# EAGLE board Board (EAGLE 9.7.0)
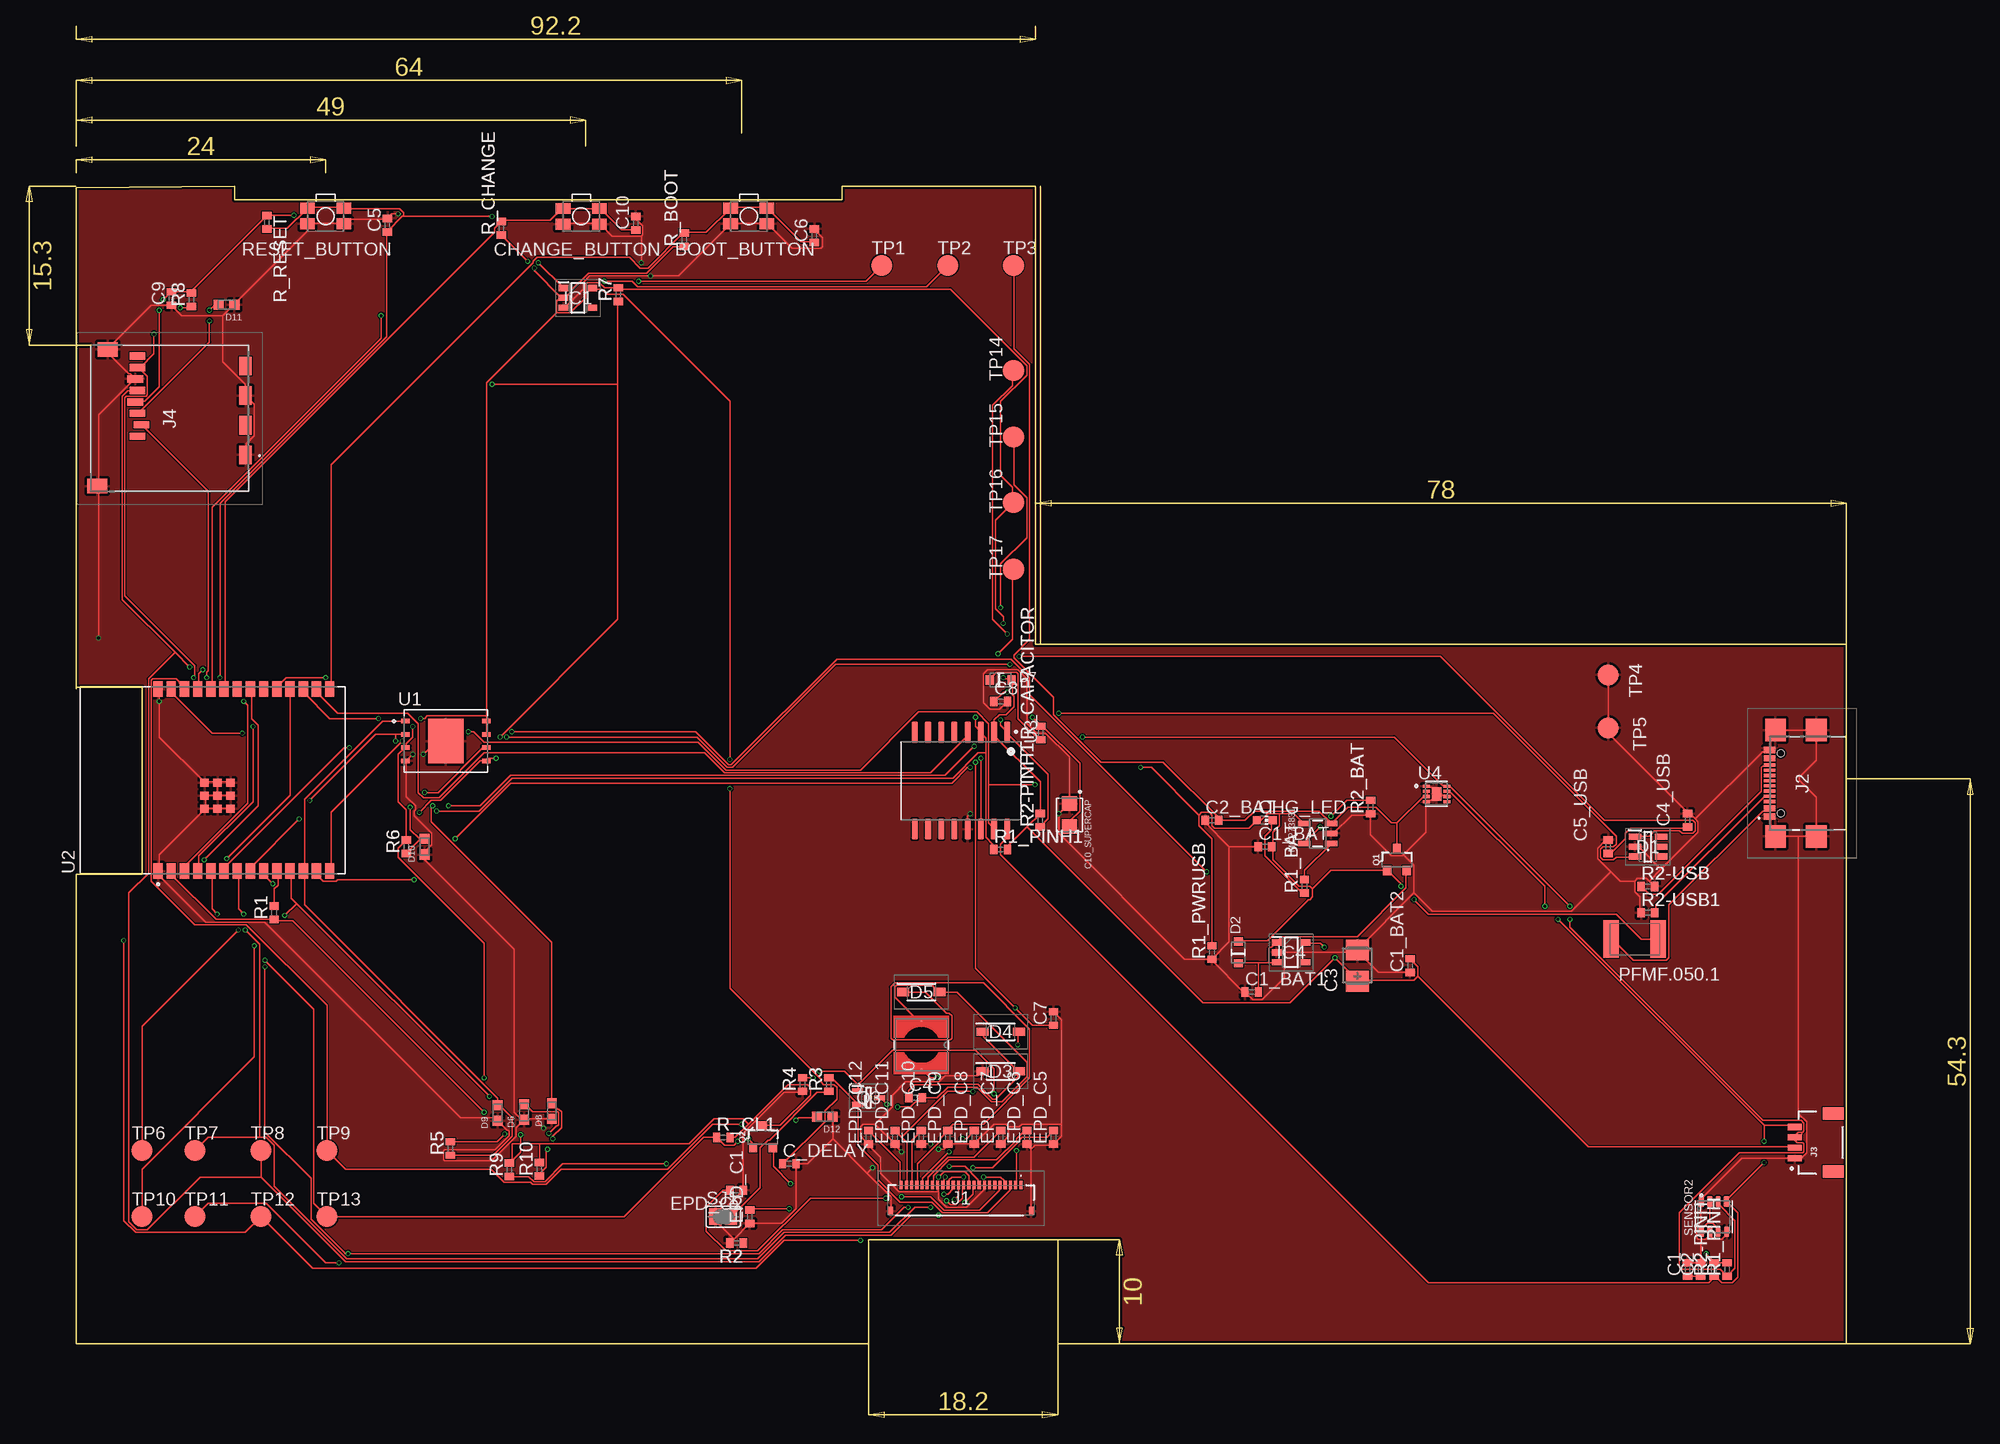
[diagram p0: board, top side]
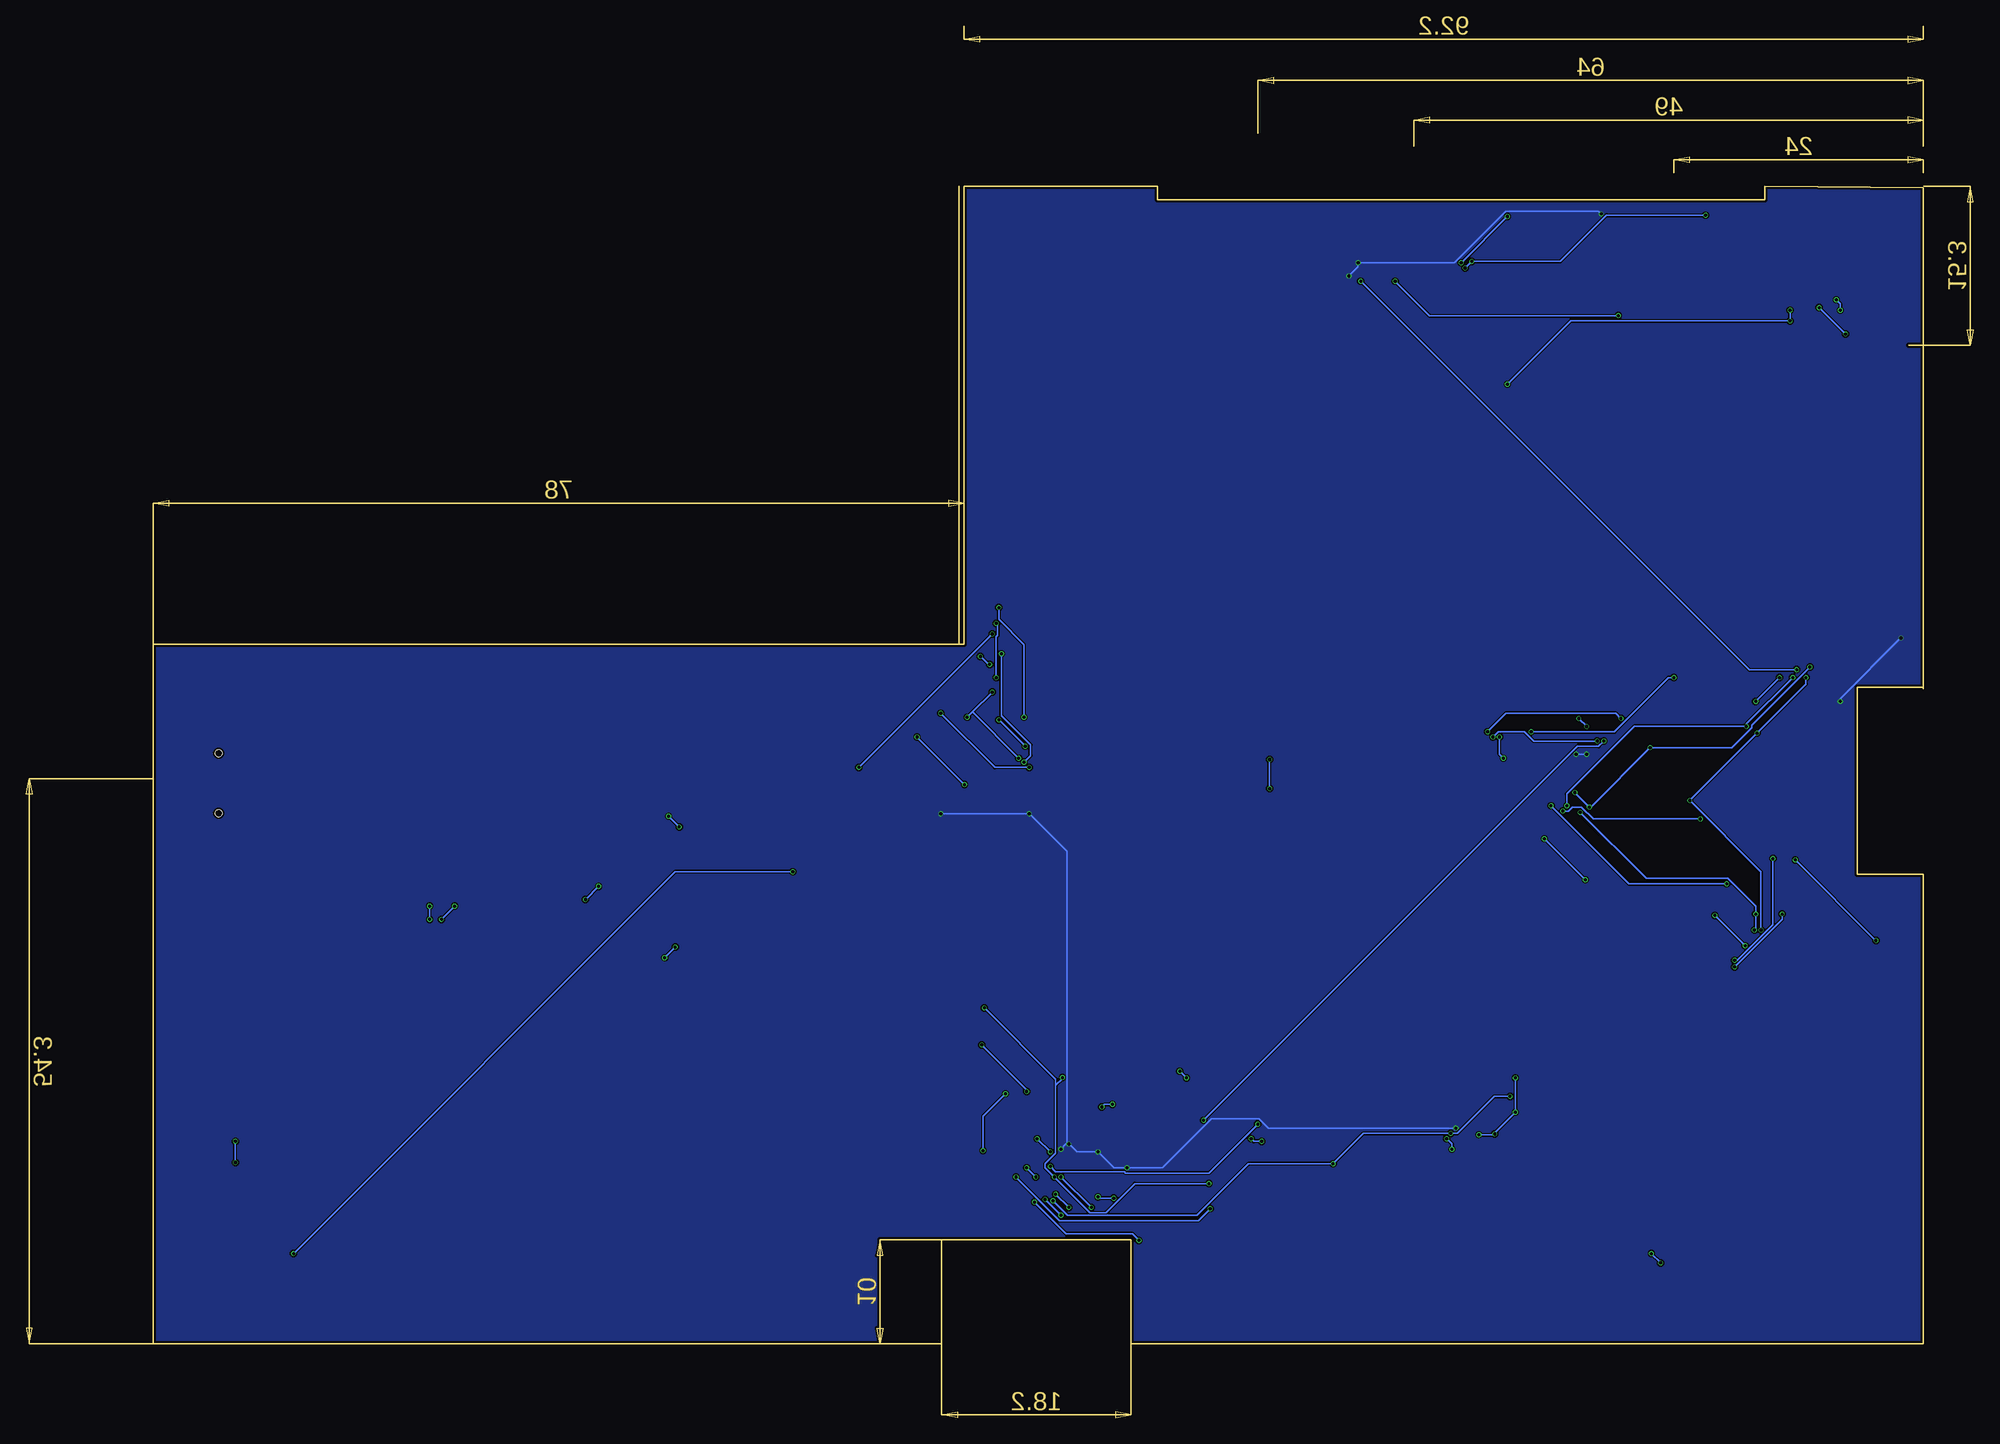
[diagram p1: board, bottom side, seen from below]

Size 170.23 x 111.28 mm. Coordinates in mm from the lower left corner, seen from the top.
Outline: 0,111.13 15.24,111.28 15.24,109.94 73.66,109.94 73.66,111.28 92.23,111.28 92.23,67.24 170.23,67.24 170.23,0 94.4,0 94.4,10 76.2,10 76.2,0 0,0 0,45.12 6.34,45.12 6.34,63.12 0,63.12 0,62.97 0,111.13
Copper layers (1*16): Top 0.035mm / dielectric 1.6mm / Bottom 0.035mm
Design rules "jlcpcb-2layers": minimum track width 5mil, minimum drill 0.3mm, track to track 5mil, track to pad 5mil, pad to pad 5mil, via to via 5mil, smd to smd 5mil, copper to edge 0.2mm, drill to drill 6mil, minimum pad ring 10mil, minimum via ring 3mil, stop-mask expansion 4mil, vias tented up to drill 0mil, thermal gap 10mil

## Footprints (pad centres in the part's own frame; a part is rotated, then mirrored left to right if it is on the bottom)
MYBUTTON = smd 1.4 x 1.05: 1 1.75,0.75; 2 -1.75,0.75; 3 -1.75,-0.75; 4 1.75,-0.75
EAGLE-LTSPICE_C0402 = smd 0.7 x 0.9: 1 -0.65,0; 2 0.65,0
RCL_CT3528 = smd 2 x 2.2: + -1.5,0; - 1.5,0
CAPCP3225X100N = smd 1.4 x 1.4: 1 -1.1,0; 2 1.1,0
ADAFRUIT_CHIP-LED0603 = smd 0.8 x 0.8: A 0,-0.75; C 0,0.75
SOT95P280X145-6N = smd 1.2 x 0.6: 1 -1.25,0.95; 2 -1.25,0; 3 -1.25,-0.95; 4 1.25,-0.95; 5 1.25,0; 6 1.25,0.95
ESP32_WROVER_AVX---SD0805S020S1R0_AVX_SD0805S020S1R0_0 = smd 0.8 x 0.9: 1 -1.05,0; 2 1.05,0
SOD3716X135N = smd 1.15 x 0.8: 1 -1.75,0; 2 1.75,0
DIOC1608X36N = smd 0.97 x 0.94: 1 -0.75,0; 2 0.75,0
SOT95P280X125-5N = smd 0.9 x 0.6: 1 -1.4,0.95; 2 -1.4,0; 3 -1.4,-0.95; 4 1.4,-0.95; 5 1.4,0.95
SOT95P280X120-5N = smd 0.9 x 0.6: 1 -1.4,0.95; 2 -1.4,0; 3 -1.4,-0.95; 4 1.4,-0.95; 5 1.4,0.95
FH34SRJ24S05SH99 = smd 0.3 x 0.8: 1 5.75,1.45; 2 5.25,1.45; 3 4.75,1.45; 4 4.25,1.45; 5 3.75,1.45; 6 3.25,1.45; 7 2.75,1.45; 8 2.25,1.45; 9 1.75,1.45; 10 1.25,1.45; 11 0.75,1.45; 12 0.25,1.45; 13 -0.25,1.45; 14 -0.75,1.45; 15 -1.25,1.45; 16 -1.75,1.45; 17 -2.25,1.45; 18 -2.75,1.45; 19 -3.25,1.45; 20 -3.75,1.45; 21 -4.25,1.45; 22 -4.75,1.45; 23 -5.25,1.45; 24 -5.75,1.45 | smd 0.4 x 0.8: MP1 6.75,-1.05; MP2 -6.75,-1.05
SAMACSYS_PARTS_USB4110GFA = smd 0.3 x 1.15: A1 -3.35,3.678; A4 -2.55,3.678; A5 -1.25,3.678; A6 -0.25,3.678; A7 0.25,3.678; A8 1.25,3.678; A9 2.55,3.678; A12 3.35,3.678; B1 3.05,3.678; B4 2.25,3.678; B5 1.75,3.678; B6 0.75,3.678; B7 -0.75,3.678; B8 -1.75,3.678; B9 -2.25,3.678; B12 -3.05,3.678 | smd 2.18 x 2: MP1 -5.11,-0.827; MP2 5.11,-0.827; MP3 -5.11,3.103; MP4 5.11,3.103 | hole 0.65: -2.89,2.603; 2.89,2.603
JST04_1MM_RA = smd 0.6 x 1.35: 1 -1.5,0; 2 -0.5,0; 3 0.5,0; 4 1.5,0 | smd 1.2 x 2: NC1 2.8,-3.675; NC2 -2.8,-3.675
112ATAARR03ATTEND = smd 1.8 x 1.2: G1 10.6,10.4; G2 4.9,10.4; S1 7.75,10.4; S2 2.05,10.4 | smd 1.4 x 1.9: G3 13.6,-3.85; G4 0.45,-2.85 | smd 0.7 x 1.5: P1 8.8,0; P2 7.7,0.4; P3 6.6,0; P4 5.5,-0.2; P5 4.4,0; P6 3.3,-0.2; P7 2.2,0; P8 1.1,0
IND_4828-WE-TPC_WRE = smd 0.127 x 0.127: 1 -2.286,0; 2 2.286,0
ESP32_WROVER_SPARKFUN-IC-POWER_SOT23-5 = smd 0.55 x 1.2: 1 -0.95,-1.3; 2 0,-1.3; 3 0.95,-1.3; 4 0.95,1.3; 5 -0.95,1.3
ESP32C6_VARISTOR_CT/CN1812 = smd 1.5 x 3.6: 1 -2.25,0; 2 2.25,0
ESP32_WROVER_SPARKFUN-DISCRETESEMI_SOT23-3 = smd 0.8 x 0.9: 1 -0.95,-1; 2 0.95,-1; 3 0,1.1
SOT65P210X110-3N = smd 1.05 x 0.5: 1 -1.05,0.65; 2 -1.05,-0.65; 3 1.05,0
ESP32_WROVER_EAGLE-LTSPICE_R0402 = smd 0.7 x 0.9: 1 -0.65,0; 2 0.65,0
ESP32_WROVER_BME680_PSON80P300X300X100-8N = smd 1.016 x 0.5: 1 1.458,1.2; 2 1.458,0.4; 3 1.458,-0.4; 4 1.458,-1.2; 5 -1.458,-1.22; 6 -1.458,-0.4; 7 -1.458,0.4; 8 -1.458,1.2
SJ = smd 1.168 x 1.6: 1 -0.762,0; 2 0.762,0
TP20R = smd 2 x 2: TP 0,0
SON127P600X800X80-9N = smd 0.94 x 0.44: 1 -3.895,1.905; 2 -3.895,0.635; 3 -3.895,-0.635; 4 -3.895,-1.905; 5 3.895,-1.905; 6 3.895,-0.635; 7 3.895,0.635; 8 3.895,1.905 | smd 3.4 x 4.3: 9 0,0
XCVR_ESP32-C6-WROOM-1-N8 = smd 1.5 x 0.9: 1 -8.75,5.26; 2 -8.75,3.99; 3 -8.75,2.72; 4 -8.75,1.45; 5 -8.75,0.18; 6 -8.75,-1.09; 7 -8.75,-2.36; 8 -8.75,-3.63; 9 -8.75,-4.9; 10 -8.75,-6.17; 11 -8.75,-7.44; 12 -8.75,-8.71; 13 -8.75,-9.98; 14 -8.75,-11.25; 15 8.75,-11.25; 16 8.75,-9.98; 17 8.75,-8.71; 18 8.75,-7.44; 19 8.75,-6.17; 20 8.75,-4.9; 21 8.75,-3.63; 22 8.75,-2.36; 23 8.75,-1.09; 24 8.75,0.18; 25 8.75,1.45; 26 8.75,2.72; 27 8.75,3.99; 28 8.75,5.26 | smd 0.8 x 0.8: 29_1 -2.755,0.79; 29_2 -1.505,0.79; 29_3 -0.255,0.79; 29_4 -2.755,-0.46; 29_5 -1.505,-0.46; 29_6 -0.255,-0.46; 29_7 -2.755,-1.71; 29_8 -1.505,-1.71; 29_9 -0.255,-1.71
SOIC127P1032X265-16N = smd 2.05 x 0.59: 1 -4.655,4.445; 2 -4.655,3.175; 3 -4.655,1.905; 4 -4.655,0.635; 5 -4.655,-0.635; 6 -4.655,-1.905; 7 -4.655,-3.175; 8 -4.655,-4.445; 9 4.655,-4.445; 10 4.655,-3.175; 11 4.655,-1.905; 12 4.655,-0.635; 13 4.655,0.635; 14 4.655,1.905; 15 4.655,3.175; 16 4.655,4.445
SON50P200X200X80-9N = smd 0.76 x 0.27: 1 -0.985,0.75; 2 -0.985,0.25; 3 -0.985,-0.25; 4 -0.985,-0.75; 5 0.985,-0.75; 6 0.985,-0.25; 7 0.985,0.25; 8 0.985,0.75 | smd 0.9 x 1.3: 9 0,0

## Placement (x,y rotation side)
BOOT_BUTTON  [MYBUTTON]  64.69,108.39 180 top
C1  100nF  [EAGLE-LTSPICE_C0402]  154.94,7.14 90 top
C1_BAT  4.7uF  [EAGLE-LTSPICE_C0402]  114.3,47.78 0 top
C1_BAT1  4.7uF  [EAGLE-LTSPICE_C0402]  113.03,33.81 0 top
C1_BAT2  4.7uF  [EAGLE-LTSPICE_C0402]  128.27,36.35 90 top
C2  100nF  [EAGLE-LTSPICE_C0402]  156.21,7.14 90 top
C2_BAT  4.7uF  [EAGLE-LTSPICE_C0402]  109.22,50.32 0 top
C3  100uF TANT  [RCL_CT3528]  123.19,36.35 90 top
C4  4.7uF/25V  [EAGLE-LTSPICE_C0402]  80.71,23.65 0 top
C4_USB  100nF  [EAGLE-LTSPICE_C0402]  154.94,50.32 90 top
C5  1uF  [EAGLE-LTSPICE_C0402]  29.95,107.52 90 top
C5_USB  4.7uF  [EAGLE-LTSPICE_C0402]  147.32,47.78 90 top
C6  100nF  [EAGLE-LTSPICE_C0402]  70.99,106.52 90 top
C7  10uF  [EAGLE-LTSPICE_C0402]  93.98,31.27 90 top
C8  100nF  [EAGLE-LTSPICE_C0402]  88.9,61.75 0 top
C9  100uF  [EAGLE-LTSPICE_C0402]  9.19,100.47 90 top
C10  100nF  [EAGLE-LTSPICE_C0402]  53.81,107.72 90 top
C10_SUPERCAP  CPH3225A  [CAPCP3225X100N]  95.52,50.82 270 top
C_DELAY  100nF  [EAGLE-LTSPICE_C0402]  68.58,17.3 0 top
CHANGE_BUTTON  [MYBUTTON]  48.58,108.38 180 top
CHG_LED  [ADAFRUIT_CHIP-LED0603]  114.3,50.32 270 top
D1  USBLC6-2SC6Y  [SOT95P280X145-6N]  151.13,47.78 0 top
D2  ESP32_WROVER_AVX---SD0805S020S1R0_AVX_SD0805S020S1R0_0_0AVX_SD0805S020S1R0_0_0  [ESP32_WROVER_AVX---SD0805S020S1R0_AVX_SD0805S020S1R0_0]  111.76,37.62 90 top
D3  MBR0530  [SOD3716X135N]  88.9,26.19 0 top
D4  MBR0530  [SOD3716X135N]  88.9,30 0 top
D5  MBR0530  [SOD3716X135N]  81.28,33.81 0 top
D6  PGB1010603MR  [DIOC1608X36N]  43.08,22.28 90 top
D7  ESP32_WROVER_AVX---SD0805S020S1R0_AVX_SD0805S020S1R0_0_0AVX_SD0805S020S1R0_0_0  [ESP32_WROVER_AVX---SD0805S020S1R0_AVX_SD0805S020S1R0_0]  88.9,63.79 0 top
D8  PGB1010603MR  [DIOC1608X36N]  45.75,22.38 90 top
D9  PGB1010603MR  [DIOC1608X36N]  40.54,22.18 90 top
D10  PGB1010603MR  [DIOC1608X36N]  33.52,47.78 90 top
D11  PGB1010603MR  [DIOC1608X36N]  14.48,99.87 180 top
D12  PGB1010603MR  [DIOC1608X36N]  71.98,21.83 180 top
EPD_C1  0.1uF/50V  [EAGLE-LTSPICE_C0402]  64.77,12.22 90 top
EPD_C2  0.1uF/50V  [EAGLE-LTSPICE_C0402]  63.5,14.76 180 top
EPD_C5  0.1uF/50V  [EAGLE-LTSPICE_C0402]  93.98,19.84 90 top
EPD_C6  0.1uF/50V  [EAGLE-LTSPICE_C0402]  91.44,19.84 90 top
EPD_C7  0.1uF/50V  [EAGLE-LTSPICE_C0402]  88.9,19.84 90 top
EPD_C8  0.1uF/50V  [EAGLE-LTSPICE_C0402]  86.36,19.84 90 top
EPD_C9  0.1uF/50V  [EAGLE-LTSPICE_C0402]  83.82,19.84 90 top
EPD_C10  0.1uF/50V  [EAGLE-LTSPICE_C0402]  81.28,19.84 90 top
EPD_C11  0.1uF/50V  [EAGLE-LTSPICE_C0402]  78.74,19.84 90 top
EPD_C12  0.1uF/50V  [EAGLE-LTSPICE_C0402]  76.2,19.84 90 top
IC1  BD5229G-TR  [SOT95P280X125-5N]  48.27,100.54 0 top
IC4  XC6220A331MR-G  [SOT95P280X120-5N]  116.84,37.62 0 top
J1  FH34SRJ-24S-0.5SH_99_  [FH34SRJ24S05SH99]  85.09,13.8 0 top
J2  J2  [SAMACSYS_PARTS_USB4110GFA]  166.51,53.88 90 top
J3  QWIIC_RIGHT_ANGLE  [JST04_1MM_RA]  165.28,19.34 90 top
J4  112A-TAAR-R03_ATTEND  [112ATAARR03ATTEND]  5.89,96.04 270 top
L1  68uH  [IND_4828-WE-TPC_WRE]  81.28,28.73 270 top
MCP73831  [ESP32_WROVER_SPARKFUN-IC-POWER_SOT23-5]  119.38,49.05 90 top
PFMF.050.1  [ESP32C6_VARISTOR_CT/CN1812]  149.86,38.89 0 top
Q1  20V/4.2A/52mΩ/1.4W  [ESP32_WROVER_SPARKFUN-DISCRETESEMI_SOT23-3]  127,46.51 0 top
Q2  20V/4.2A/52mΩ/1.4W  [ESP32_WROVER_SPARKFUN-DISCRETESEMI_SOT23-3]  66.04,19.84 0 top
Q3  SI1308EDL-T1-GE3  [SOT65P210X110-3N]  76.2,23.65 0 top
R1  10K  [ESP32_WROVER_EAGLE-LTSPICE_R0402]  19.05,41.43 90 top
R1_BAT  200  [ESP32_WROVER_EAGLE-LTSPICE_R0402]  118.11,43.97 90 top
R1_PINH  10K  [ESP32_WROVER_EAGLE-LTSPICE_R0402]  158.75,7.14 90 top
R1_PINH1  10K  [ESP32_WROVER_EAGLE-LTSPICE_R0402]  88.9,47.51 0 top
R1_PWRUSB  100K  [ESP32_WROVER_EAGLE-LTSPICE_R0402]  109.22,37.62 90 top
R2  2.2  [ESP32_WROVER_EAGLE-LTSPICE_R0402]  63.5,9.68 180 top
R2-PINH  10K  [ESP32_WROVER_EAGLE-LTSPICE_R0402]  157.48,7.14 90 top
R2-PINH1  10K  [ESP32_WROVER_EAGLE-LTSPICE_R0402]  92.71,50.32 90 top
R2-USB  5k1  [ESP32_WROVER_EAGLE-LTSPICE_R0402]  151.13,43.97 0 top
R2-USB1  5k1  [ESP32_WROVER_EAGLE-LTSPICE_R0402]  151.13,41.43 0 top
R2_BAT  2K  [ESP32_WROVER_EAGLE-LTSPICE_R0402]  124.46,51.59 90 top
R3  0.47  [ESP32_WROVER_EAGLE-LTSPICE_R0402]  72.39,24.92 90 top
R4  10K  [ESP32_WROVER_EAGLE-LTSPICE_R0402]  69.85,24.92 90 top
R5  10K  [ESP32_WROVER_EAGLE-LTSPICE_R0402]  35.99,18.77 90 top
R6  10K  [ESP32_WROVER_EAGLE-LTSPICE_R0402]  31.75,47.78 90 top
R7  10K  [ESP32_WROVER_EAGLE-LTSPICE_R0402]  52.14,100.85 90 top
R8  10K  [ESP32_WROVER_EAGLE-LTSPICE_R0402]  11.1,100.35 90 top
R9  10K  [ESP32_WROVER_EAGLE-LTSPICE_R0402]  41.68,16.72 90 top
R10  10K  [ESP32_WROVER_EAGLE-LTSPICE_R0402]  44.55,16.77 90 top
R_BOOT  10K  [ESP32_WROVER_EAGLE-LTSPICE_R0402]  58.48,106.12 90 top
R_CAPACITOR  15  [ESP32_WROVER_EAGLE-LTSPICE_R0402]  92.75,58.71 90 top
R_CHANGE  10K  [ESP32_WROVER_EAGLE-LTSPICE_R0402]  40.91,107.22 90 top
R_CL1  10K  [ESP32_WROVER_EAGLE-LTSPICE_R0402]  62.23,19.84 0 top
R_RESET  10K  [ESP32_WROVER_EAGLE-LTSPICE_R0402]  18.35,107.82 270 top
RESET_BUTTON  [MYBUTTON]  24,108.39 180 top
SENSOR2  BME688  [ESP32_WROVER_BME680_PSON80P300X300X100-8N]  157.48,12.22 90 top
SJ1  [SJ]  62.23,12.22 0 top
TP1  TPTP20R  [TP20R]  77.47,103.66 0 top
TP2  TPTP20R  [TP20R]  83.82,103.66 0 top
TP3  TPTP20R  [TP20R]  90.14,103.66 0 top
TP4  TPTP20R  [TP20R]  147.32,64.29 270 top
TP5  TPTP20R  [TP20R]  147.32,59.21 270 top
TP6  TPTP20R  [TP20R]  6.35,18.57 0 top
TP7  TPTP20R  [TP20R]  11.43,18.57 0 top
TP8  TPTP20R  [TP20R]  17.78,18.57 0 top
TP9  TPTP20R  [TP20R]  24.13,18.57 0 top
TP10  TPTP20R  [TP20R]  6.35,12.22 0 top
TP11  TPTP20R  [TP20R]  11.43,12.22 0 top
TP12  TPTP20R  [TP20R]  17.78,12.22 0 top
TP13  TPTP20R  [TP20R]  24.13,12.22 0 top
TP14  TPTP20R  [TP20R]  90.14,93.55 90 top
TP15  TPTP20R  [TP20R]  90.14,87.15 90 top
TP16  TPTP20R  [TP20R]  90.14,80.85 90 top
TP17  TPTP20R  [TP20R]  90.14,74.45 90 top
U1  W25Q512JVEIQ  [SON127P600X800X80-9N]  35.56,57.94 0 top
U2  ESP32-C6-WROOM-1-N8  [XCVR_ESP32-C6-WROOM-1-N8]  13.14,54.18 90 top
U3  DS3231SN#  [SOIC127P1032X265-16N]  85.09,54.13 270 top
U4  MAX17048G+T10  [SON50P200X200X80-9N]  130.81,52.86 0 top

## Library data of the parts
BOOT_BUTTON CHANGE_BUTTON CHG_LED PFMF.050.1 RESET_BUTTON SJ1 TP1-TP17 = DeskAssistant v19 v1
C1 C1_BAT C1_BAT1 C1_BAT2 C2 C2_BAT C4 C4_USB C5 C5_USB C6-C10 C_DELAY EPD_C1 EPD_C2 EPD_C5-EPD_C12 = DeskAssistant v19 v1; SPICEMODEL: NONE; SPICEPREFIX: C
C3 = DeskAssistant v19 v1; SPICEPREFIX: C
C10_SUPERCAP = DeskAssistant v19 v1; AVAILABILITY: Not in stock; CHECK_PRICES: https://www.snapeda.com/parts/CPH3225A/Seiko+Instruments/view-part/?ref=eda; DESCRIPTION: 11 mF (EDLC) Supercapacitor 3.3 V 1210 (3225 Metric) - -; MF: Seiko Instruments; MP: CPH3225A; PACKAGE: 1210 Seiko; PRICE: None; PURCHASE-URL: https://www.snapeda.com/api/url_track_click_mouser/?unipart_id=562593&manufacturer=Seiko Instruments&part_name=CPH3225A&search_term=None; SNAPEDA_LINK: https://www.snapeda.com/parts/CPH3225A/Seiko+Instruments/view-part/?ref=snap
D1 = DeskAssistant v19 v1; AVAILABILITY: In Stock; CHECK_PRICES: https://www.snapeda.com/parts/USBLC6-2SC6Y/STMicroelectronics/view-part/?ref=eda; DESCRIPTION: 17V Clamp 5A (8/20µs) Ipp Tvs Diode Surface Mount SOT-23-6; MF: STMicroelectronics; MP: USBLC6-2SC6Y; PACKAGE: SOT-23-6 STMicroelectronics; PRICE: None; SNAPEDA_LINK: https://www.snapeda.com/parts/USBLC6-2SC6Y/STMicroelectronics/view-part/?ref=snap
D2 D7 = DeskAssistant v19 v1; CENTROID_NOT_SPECIFIED: No; DATASHEET: http://datasheets.avx.com/schottky.pdf; DIGIKEY_DESCRIPTION: DIODE SCHOTTKY 20V 1A 0805; DIGIKEY_PART_NUMBER: 478-7800-1-ND; LEAD_FREE: yes; MF: AVX; MOUSER_PART_NUMBER: 581-SD0805S020S1R0; PACKAGE: 0805 (2012 metric); PREFIX: D; ROHS: yes; TEMPERATURE_RANGE_HIGH: +125°C; TEMPERATURE_RANGE_LOW: -55°C
D3-D5 = DeskAssistant v19 v1; AVAILABILITY: In Stock; CHECK_PRICES: https://www.snapeda.com/parts/MBR0530/Onsemi/view-part/?ref=eda; DESCRIPTION: Diode Schottky 30 V 500mA Surface Mount SOD-123; MF: ON Semiconductor; MP: MBR0530; PACKAGE: SOD-123-2 ON Semiconductor; PRICE: None; PURCHASE-URL: https://www.snapeda.com/api/url_track_click_mouser/?unipart_id=179458&manufacturer=ON Semiconductor&part_name=MBR0530&search_term=None; SNAPEDA_LINK: https://www.snapeda.com/parts/MBR0530/Onsemi/view-part/?ref=snap
D6 D8-D12 = DeskAssistant v19 v1; AVAILABILITY: In Stock; CHECK_PRICES: https://www.snapeda.com/parts/PGB1010603MR/Littelfuse/view-part/?ref=eda; DESCRIPTION: 150V (Typ) Clamp - Ipp Tvs Diode Surface Mount 0603 (1608 Metric); MF: Littelfuse Inc.; MP: PGB1010603MR; PACKAGE: 0603 Littelfuse Inc.; PRICE: None; PURCHASE-URL: https://www.snapeda.com/api/url_track_click_mouser/?unipart_id=5659453&manufacturer=Littelfuse Inc.&part_name=PGB1010603MR&search_term=None; SNAPEDA_LINK: https://www.snapeda.com/parts/PGB1010603MR/Littelfuse/view-part/?ref=snap
IC1 = DeskAssistant v19 v1; DESCRIPTION: Voltage Detector with Adjustable Delay Time: CMOS processes are utilized to develop high precision, low current consumption CMOS reset ICs that allow arbitrary setting of the delay time. The extensive lineup includes both Nch Open Drain and CMOS output types in a wide range of detection voltages (from 2.3V to 6.0V, in 0.1V steps), enabling selection of the ideal solution based on customer requirements. In addition, the entire series is of course both lead-free and RoHS-compliant.; HEIGHT: 1.25mm; MANUFACTURER_NAME: ROHM Semiconductor; MANUFACTURER_PART_NUMBER: BD5229G-TR; MOUSER_PART_NUMBER: 755-BD5229G-TR; MOUSER_PRICE-STOCK: https://www.mouser.co.uk/ProductDetail/ROHM-Semiconductor/BD5229G-TR?qs=4kLU8WoGk0vvnhrrYwdszw%3D%3D
IC4 = DeskAssistant v19 v1; DESCRIPTION: LDO Voltage Regulators; HEIGHT: 1.2mm; MANUFACTURER_NAME: Torex; MANUFACTURER_PART_NUMBER: XC6220A331MR-G; MOUSER_PART_NUMBER: 865-XC6220A331MR-G; MOUSER_PRICE-STOCK: https://www.mouser.co.uk/ProductDetail/Torex-Semiconductor/XC6220A331MR-G?qs=AsjdqWjXhJ8ZSWznL1J0gg%3D%3D
J1 = DeskAssistant v19 v1; DESCRIPTION: 24 Position FFC, FPC Connector Contacts, Top and Bottom 0.020" (0.50mm) Surface Mount, Right Angle; HEIGHT: 1.1mm; MANUFACTURER_NAME: Hirose; MANUFACTURER_PART_NUMBER: FH34SRJ-24S-0.5SH(99); MOUSER_PART_NUMBER: 798-FH34SRJ24S05SH99; MOUSER_PRICE-STOCK: https://www.mouser.co.uk/ProductDetail/Hirose-Connector/FH34SRJ-24S-0.5SH99?qs=vcbW%252B4%252BSTIpKBl5ap9J8Fw%3D%3D
J2 = DeskAssistant v19 v1; DESCRIPTION: CONN USB 2.0 TYPE-C R/A SMT; HEIGHT: 3.26mm; MANUFACTURER_NAME: GCT (GLOBAL CONNECTOR TECHNOLOGY); MANUFACTURER_PART_NUMBER: USB4110-GF-A; MOUSER_PART_NUMBER: 640-USB4110-GF-A; MOUSER_PRICE-STOCK: https://www.mouser.co.uk/ProductDetail/GCT/USB4110-GF-A?qs=KUoIvG%2F9IlYiZvIXQjyJeA%3D%3D
J3 = DeskAssistant v19 v1; PROD_ID: CONN-13694
J4 = DeskAssistant v19 v1; DESCRIPTION: Micro SD Card Socket, Push-Push Type, Top Mount, SMT, H=1.83mm, 10u; HEIGHT: 1.9mm; MANUFACTURER_NAME: ATTEND; MANUFACTURER_PART_NUMBER: 112A-TAAR-R03 ATTEND
L1 = DeskAssistant v19 v1; COPYRIGHT: Copyright (C) 2024 Ultra Librarian. All rights reserved.; MANUFACTURER_PART_NUMBER: 744043680; MFR_NAME: Wurth Electronics
MCP73831 = DeskAssistant v19 v1; PROD_ID: IC-09995
Q1 Q2 = DeskAssistant v19 v1; PROD_ID: TRAN-14388
Q3 = DeskAssistant v19 v1; AVAILABILITY: In Stock; CHECK_PRICES: https://www.snapeda.com/parts/SI1308EDL-T1-GE3/Vishay+Siliconix/view-part/?ref=eda; DESCRIPTION: Si1308EDL-T1-GE3 N-channel MOSFET Transistor, 1.5 A, 30 V, 3-Pin SC-70 | Siliconix / Vishay SI1308EDL-T1-GE3; MF: Vishay Siliconix; MP: SI1308EDL-T1-GE3; PACKAGE: SOT-323 Vishay Semiconductor; PRICE: None; PURCHASE-URL: https://www.snapeda.com/api/url_track_click_mouser/?unipart_id=274603&manufacturer=Vishay Siliconix&part_name=SI1308EDL-T1-GE3&search_term=None; SNAPEDA_LINK: https://www.snapeda.com/parts/SI1308EDL-T1-GE3/Vishay+Siliconix/view-part/?ref=snap
R1 R1_BAT R1_PINH R1_PINH1 R1_PWRUSB R2 R2-PINH R2-PINH1 R2-USB R2-USB1 R2_BAT R3-R10 R_BOOT R_CAPACITOR R_CHANGE R_CL1 R_RESET = DeskAssistant v19 v1; SPICEMODEL: NONE; SPICEPREFIX: R
SENSOR2 = DeskAssistant v19 v1; AVAILABILITY: Unavailable; DESCRIPTION: Integrated Environmental Unit; MF: Bosch Sensortec; MP: BME680; PACKAGE: LGA-8 Bosch Tools; PRICE: None
U1 = DeskAssistant v19 v1; AVAILABILITY: In Stock; CHECK_PRICES: https://www.snapeda.com/parts/W25Q512JVEIQ/Winbond+Electronics/view-part/?ref=eda; DESCRIPTION: FLASH - NOR Memory IC 512Mb (64M x 8) SPI - Quad I/O 133 MHz 8-WSON (8x6); MF: Winbond Electronics; MP: W25Q512JVEIQ; PACKAGE: Package; PRICE: None; SNAPEDA_LINK: https://www.snapeda.com/parts/W25Q512JVEIQ/Winbond+Electronics/view-part/?ref=snap
U2 = DeskAssistant v19 v1; AVAILABILITY: In Stock; CHECK_PRICES: https://www.snapeda.com/parts/ESP32-C6-WROOM-1-N8/Espressif+Systems/view-part/?ref=eda; DESCRIPTION: Multiprotocol Modules ESP32-C6 module, Wi-Fi 6 in 2.4 GHz band, Bluetooth 5, Zigbee 3.0 and Thread. ESP34-WROOM Compatible - ENGINEERING SAMPLE; MF: Espressif Systems; MP: ESP32-C6-WROOM-1-N8; PACKAGE: None; PRICE: None; SNAPEDA_LINK: https://www.snapeda.com/parts/ESP32-C6-WROOM-1-N8/Espressif+Systems/view-part/?ref=snap
U3 = DeskAssistant v19 v1; AVAILABILITY: In Stock; CHECK_PRICES: https://www.snapeda.com/parts/DS3231SN%23/Analog+Devices/view-part/?ref=eda; DESCRIPTION: Extremely Accurate I²C-Integrated RTC/TCXO/Crystal; MF: Analog Devices; MP: DS3231SN#; PACKAGE: SOIC-16 Maxim; PRICE: None; PURCHASE-URL: https://www.snapeda.com/api/url_track_click_mouser/?unipart_id=99048&manufacturer=Analog Devices&part_name=DS3231SN#&search_term=None; SNAPEDA_LINK: https://www.snapeda.com/parts/DS3231SN%23/Analog+Devices/view-part/?ref=snap
U4 = DeskAssistant v19 v1; AVAILABILITY: In Stock; CHECK_PRICES: https://www.snapeda.com/parts/MAX17048G+T10/Analog+Devices/view-part/?ref=eda; DESCRIPTION: 3µA 1-Cell/2-Cell Fuel Gauge with ModelGauge; MF: Analog Devices; MP: MAX17048G+T10; PACKAGE: TDFN-8 Maxim; PRICE: None; PURCHASE-URL: https://www.snapeda.com/api/url_track_click_mouser/?unipart_id=329239&manufacturer=Analog Devices&part_name=MAX17048G+T10&search_term=None; SNAPEDA_LINK: https://www.snapeda.com/parts/MAX17048G+T10/Analog+Devices/view-part/?ref=snap

## Nets
2C_PW: SENSOR2.2 SENSOR2.6 SENSOR2.8
3V3: C1_BAT2.2 C3.+ C9.2 D7.2 IC1.2 IC4.5 J3.2 J4.P4 Q2.3 R1.1 R1_PINH1.2 R2-PINH1.2 R5.2 R6.2 R7.2 R8.2 R9.2 R10.2 R_BOOT.1 R_CHANGE.1 R_CL1.2 R_RESET.1 TP16.TP U1.3 U1.7 U1.8 U2.2 U3.2
32KHZ: R2-PINH1.1 U2.9 U3.1
DN: J2.A7
DP: J2.A6
EPD_3V3: C7.1 J1.16 L1.2 Q2.2 TP17.TP
EPD_3V3_C: Q2.1 R_CL1.1 TP13.TP U2.18
EPD_BUSY: J1.9 TP9.TP U2.26
EPD_CS: D6.2 J1.12 R9.1 TP10.TP U2.11
EPD_DC: J1.11 TP11.TP U2.5
EPD_RST: J1.10 TP12.TP U2.21
FLASH_CS: D9.2 R5.1 U1.1 U2.12
GDR: J1.2 Q3.1 R4.2
GND: BOOT_BUTTON.1 BOOT_BUTTON.2 C1.2 C1_BAT1.1 C1_BAT2.1 C1_BAT.1 C2.2 C2_BAT.1 C3.- C4_USB.2 C5.2 C5_USB.2 C6.2 C7.2 C8.2 C9.1 C10.2 C10_SUPERCAP.1 C_DELAY.2 CHANGE_BUTTON.1 CHANGE_BUTTON.2 D1.2 D3.1 D6.1 D8.1 D9.1 D10.1 D11.1 D12.1 EPD_C1.1 EPD_C2.1 EPD_C5.1 EPD_C6.1 EPD_C7.1 EPD_C8.1 EPD_C9.1 EPD_C10.1 EPD_C11.1 EPD_C12.1 IC1.3 IC4.2 J1.8 J1.17 J1.MP1 J1.MP2 J2.A1 J2.A12 J2.B1 J2.B12 J2.MP1 J2.MP2 J2.MP3 J2.MP4 J3.1 J4.G1 J4.G2 J4.G3 J4.G4 J4.P6 MCP73831.2 R1_PWRUSB.1 R2-USB1.1 R2-USB.2 R2.2 R2_BAT.1 R4.1 RESET_BUTTON.1 RESET_BUTTON.2 SENSOR2.1 SENSOR2.5 SENSOR2.7 SJ1.1 TP4.TP TP5.TP U1.4 U1.9 U2.1 U2.28 U2.29_1 U2.29_2 U2.29_3 U2.29_4 U2.29_5 U2.29_6 U2.29_7 U2.29_8 U2.29_9 U3.13 U4.1 U4.4 U4.6 U4.9
GPIO8: R1.2 U2.10
I2C_PW: R1_PINH.2 R2-PINH.2 U2.17
INT_RTC: R1_PINH1.1 TP15.TP U2.8 U3.3
IO/BOOT: BOOT_BUTTON.3 BOOT_BUTTON.4 C6.1 R_BOOT.2 U2.15
IO/CHANGE: C10.1 CHANGE_BUTTON.3 CHANGE_BUTTON.4 R_CHANGE.2 U2.23
MISO: D12.2 J4.P7 R8.1 TP6.TP U1.2 U2.27
MOSI: D11.2 J1.14 J4.P3 R7.1 TP7.TP U1.5 U2.7
N$1: J2.A5 R2-USB1.2
N$2: J2.B5 R2-USB.1
N$3: J2.B9
N$4: J2.A9
N$5: J2.B4
N$6: J2.B6
N$7: D1.4
N$8: D1.5
N$9: D1.6
N$10: C4_USB.1 C5_USB.1
N$11: J2.B7
N$12: R2.1
N$13: C4.1 D3.2 D4.1
N$14: MCP73831.1 R1_BAT.2
N$15: C1_BAT1.2 D2.1 IC4.1 IC4.3 Q1.2
N$16: CHG_LED.C R1_BAT.1
N$17: EPD_C12.2 J1.24
N$18: MCP73831.5 R2_BAT.2
N$19: C1.1 C2.1
N$20: C_DELAY.1 IC1.5
N$21: D7.1 R_CAPACITOR.1
N$22: EPD_C10.2 J1.22
N$26: EPD_C8.2 J1.20
N$28: EPD_C7.2 J1.19
N$30: EPD_C6.2 J1.18
N$32: EPD_C5.2 J1.15
N$34: EPD_C2.2 J1.5
N$36: EPD_C1.2 J1.4
PREVGH: D5.1 EPD_C9.2 J1.21
PREVGL: D4.2 EPD_C11.2 J1.23
RESE: J1.3 Q3.2 R3.2
RESE': R3.1 SJ1.2
RESET: C5.1 IC1.1 R_RESET.2 RESET_BUTTON.3 RESET_BUTTON.4 U2.3
RTC_RST: U2.16 U3.4
RX: TP2.TP U2.24
SCK: D10.2 J1.13 J4.P5 R6.1 TP8.TP U1.6 U2.6
SCL: J3.4 R2-PINH.1 SENSOR2.4 U3.16 U4.7
SDA: J3.3 R1_PINH.1 SENSOR2.3 U2.19 U3.15 U4.8
SLC: U2.20
SRC: C4.2 D5.2 L1.1 Q3.3
SS_SD: D8.2 J4.P2 R10.1 U2.4
TX: TP1.TP U2.25
USB_D+: D1.1 U2.14
USB_D-: D1.3 U2.13
VBAT: C2_BAT.2 MCP73831.3 Q1.3 TP3.TP U4.2 U4.3
VBUS: C1_BAT.2 CHG_LED.A D2.2 MCP73831.4 PFMF.050.1.2 Q1.1 R1_PWRUSB.2 TP14.TP
VRTC: C8.1 C10_SUPERCAP.2 R_CAPACITOR.2 U3.14
VUSB: J2.A4 PFMF.050.1.1

## Tracks (layer width: path | path; a pad name or v marks a point on that pad's centre or on a via)
2C_PW
  Top 0.127: 157.1,11.58 157.35,11.58 157.86,11.08 157.86,10.82 SENSOR2.6 | 157.1,11.58 156.84,11.58 156.34,11.08 156.34,10.82 SENSOR2.8 | 157.1,11.58 157.1,13.62 SENSOR2.2
3V3  (via drill 0.3)
  Top 0.127: 91.44,49.68 92.71,50.95 R2-PINH1.2 92.71,54 88.27,58.45 U3.2 88.27,59.97 88.77,60.48 89.41,60.48 90.17,61.24 90.17,62.26 90.04,62.38 90.04,63.78 D7.2 89.92,63.91 89.28,63.91 v89.15,64.03 | 91.44,49.68 89.66,47.91 89.66,47.52 R1_PINH1.2 | v120.02,38.13 119.63,38.51 118.36,38.51 IC4.5 | 123.19,34.95 v121.03,37.11 116.71,32.79 108.33,32.79 91.44,49.68 | 129.03,35.33 129.03,36.22 128.27,36.98 C1_BAT2.2 | 129.03,35.33 128.65,34.95 123.19,34.95 | 123.19,34.95 C3.+ | 129.03,35.33 145.41,18.95 165.17,18.95 J3.2 | U2.2 9.27,45.37 9.27,44.98 13.46,40.79 19.05,40.79 R1.1 19.05,40.67 20.83,40.67 v39.24,22.25 | v42.74,20.09 42.74,18.43 R9.2 41.93,17.62 41.93,19.2 44.55,19.2 | R_CL1.2 63.37,19.84 64.64,21.11 | 64.64,21.11 68.45,24.92 70.36,24.92 70.61,24.66 70.61,23.9 67.69,20.98 66.04,20.98 Q2.3 | 44.55,19.2 58.93,19.2 61.34,21.62 64.14,21.62 64.64,21.11 | 44.55,19.2 R10.2 | 11.05,101.12 C9.2 9.14,101.12 v8.38,100.36 | 11.05,101.12 18.29,108.36 R_RESET.1 18.41,108.48 v20.95,108.48 | 11.05,101.12 R8.2 | v8,99.34 8,91.97 6.6,90.58 5.71,90.58 J4.P4 | 39.5,59.84 39.5,58.57 U1.7 | v43.43,104.04 41.02,106.45 R_CHANGE.1 | v44.07,103.4 44.07,103.15 46.61,100.61 | 46.61,100.61 46.86,100.61 IC1.2 | 46.23,99.09 47.5,99.09 49.02,100.61 49.02,101.88 49.15,102.01 50.29,102.01 50.8,101.5 52.07,101.5 R7.2 52.2,101.37 84.07,101.37 91.44,94.01 91.44,93.12 88.9,90.58 88.9,83.47 90.04,82.32 90.04,80.92 TP16.TP 90.04,80.8 88.39,79.15 88.39,70.64 89.15,69.88 v89.15,69.24 | 46.23,99.09 46.23,100.23 46.61,100.61 | 46.61,100.61 IC1.2 | R_BOOT.1 58.42,105.44 57.4,105.44 54.86,102.9 49.28,102.9 47.62,101.25 47.62,101.12 46.99,100.48 IC1.2
  Top 0.127: 39.5,60.35 39.5,92.36 46.23,99.09 | 39.5,60.35 39.5,59.84 | 39.5,59.84 U1.8 | v32.39,59.34 32.39,58.32 31.75,57.68 31.75,57.3 U1.3 31.62,57.3 30.99,56.67 30.99,52.1 31.75,51.33 R6.2 31.75,48.41 30.99,47.65 30.99,46.76 39.24,38.51 v39.24,25.55 | v33.15,60.1 33.53,60.1 33.78,60.35 39.5,60.35 | v41.22,20.16 40.48,19.42 R5.2
  Bottom 0.127: v121.03,37.11 v120.02,38.13 | 41.39,20.11 v39.24,22.25 v39.24,25.55 | v8,99.34 8,99.97 v8.38,100.36 | v44.07,103.4 v43.43,104.04 34.92,104.04 30.48,108.48 v20.95,108.48 | v33.15,60.1 v32.39,59.34 | v89.15,64.03 89.15,67.97 89.03,68.1 89.03,69.11 v89.15,69.24 | v42.74,20.09 41.4,20.09 41.39,20.11 | 41.39,20.11 41.27,20.11 v41.22,20.16
32KHZ  (via drill 0.3)
  Top 0.127: R2-PINH1.1 92.71,49.68 93.47,50.45 93.47,54.76 89.53,58.7 U3.1 89.53,58.83 88.9,59.46 v88.9,59.97 | v18.92,44.22 18.16,44.98 18.16,45.37 U2.9 | v35.81,51.72 38.86,51.72 41.78,54.64 83.57,54.64 v86.36,57.43
  Bottom 0.127: v18.92,44.22 28.32,44.22 v35.81,51.72 | v88.9,59.97 v86.36,57.43
EPD_3V3  (via drill 0.3)
  Top 0.127: v83.57,16.03 83.44,15.9 83.44,15.27 J1.16 | L1.2 82.14,25.58 v82.79,25.58 | v68.71,15.39 67.06,17.04 67.06,18.82 Q2.2 | C7.1 93.98,30.63 91.95,30.63 v90.3,32.28 86.49,36.09 v86.49,55.91 | v88.65,66.32 90.04,67.72 90.04,74.45 TP17.TP
  Bottom 0.127: 83.44,24.83 83.44,25.43 v90.3,32.28 | 83.44,24.83 83.44,18.31 84.45,17.3 84.45,16.92 v83.57,16.03 80.14,12.6 78.61,12.6 75.82,15.39 v68.71,15.39 | v88.65,66.32 88.65,60.35 85.85,57.56 85.85,56.54 v86.49,55.91 | v82.79,25.58 82.79,25.48 83.44,24.83
EPD_3V3_C  (via drill 0.3)
  Top 0.127: v64.64,19.71 65.02,19.33 65.02,18.95 Q2.1 | v63.63,19.46 63.25,19.08 62.36,19.08 61.59,19.84 R_CL1.1 60.33,19.84 52.7,12.22 TP13.TP 22.86,13.49 22.86,32.16 v18.16,36.86 | v14.48,46.64 20.57,52.73 20.57,62.89 U2.18
  Bottom 0.127: v64.64,19.71 64.39,19.46 v63.63,19.46 | v14.48,46.64 14.48,40.28 17.91,36.86 v18.16,36.86
EPD_BUSY  (via drill 0.3)
  Top 0.127: v83.95,17.04 85.47,17.04 86.74,15.77 86.74,15.27 J1.9 | v64.01,21.11 61.21,21.11 56.9,16.79 46.65,16.79 45.18,15.32 43.92,15.32 43.71,15.53 41.15,15.53 39.89,16.79 25.91,16.79 TP9.TP 24.13,32.54 16.38,40.28 11.43,40.28 7.24,44.48 7.24,63.78 7.37,63.91 9.65,63.91 9.91,63.65 9.91,63.53 10.41,63.02 U2.26
  Bottom 0.127: v83.95,17.04 83.44,16.54 76.84,16.54 76.71,16.41 68.71,16.41 v64.01,21.11
EPD_CS  (via drill 0.3)
  Top 0.127: v83.69,13.74 84.07,13.36 84.58,13.36 85.22,14 85.22,15.14 J1.12 | D6.2 43.17,23.03 43.89,22.3 46.3,22.3 46.41,22.19 46.41,21.06 46.3,20.95 46.2,20.95 v45.47,20.22 | 21.21,42.32 v39.75,23.78 | 21.21,42.32 20.7,42.83 20.7,45.37 U2.11 | TP10.TP 6.35,16.79 17.14,27.59 v17.14,38.25 | 21.21,42.32 v20.07,41.17 | v56.77,17.3 46.8,17.3 45.08,15.58 44.02,15.58 43.53,16.07 R9.1
  Bottom 0.127: v83.69,13.74 82.3,12.35 69.85,12.35 64.9,17.3 v56.77,17.3 53.85,20.22 v45.47,20.22 44.83,20.22 41.28,23.78 v39.75,23.78 | v20.07,41.17 v17.14,38.25
EPD_DC  (via drill 0.3)
  Top 0.127: v82.93,16.03 83.44,16.54 85.47,16.54 85.85,16.16 85.85,15.27 J1.11 | v80.01,13.11 79.63,13.11 77.47,10.95 67.95,10.95 65.66,8.66 v26.16,8.66 25.91,8.66 22.61,11.96 22.61,15.9 18.16,20.35 v18.16,36.22 | v25.27,7.77 24,7.77 18.29,13.49 12.7,13.49 TP11.TP | v13.59,41.3 13.08,41.81 13.08,45.37 U2.5
  Bottom 0.127: v80.01,13.11 v82.93,16.03 | v25.27,7.77 v26.16,8.66 | v13.59,41.3 13.59,40.79 v18.16,36.22
EPD_RST  (via drill 0.3)
  Top 0.127: v85.47,13.62 86.23,14.38 86.23,15.14 J1.10 | v75.44,9.93 68.07,9.93 65.41,7.27 22.73,7.27 TP12.TP 16.26,10.69 5.71,10.69 4.57,11.84 v4.57,38.76 | v12.32,46.51 17.53,51.72 17.53,59.46 16.89,60.1 16.89,62.89 U2.21
  Bottom 0.127: v85.47,13.62 82.42,10.57 76.07,10.57 v75.44,9.93 | v4.57,38.76 v12.32,46.51
FLASH_CS
  Top 0.127: U1.1 29.46,59.84 21.97,52.35 21.97,45.49 U2.12 21.97,45.37 21.97,42.19 40.54,23.62 D9.2 40.72,22.93 41.94,21.71 41.94,19.93 40.13,18.12 R5.1
GDR  (via drill 0.3)
  Top 0.127: v90.42,18.57 90.42,15.27 J1.2 | v88.27,24.03 88.27,26.44 86.49,28.22 78.49,28.22 75.18,24.92 | 75.18,24.92 75.18,24.41 Q3.1 | v70.87,25.55 69.85,25.55 R4.2 | v71.5,26.19 73.91,26.19 75.18,24.92
  Bottom 0.127: v90.42,18.57 90.42,21.87 v88.27,24.03 | v71.5,26.19 v70.87,25.55
GND  (via drill 0.3)
  Top 0.127: 54.36,106.45 54.48,106.58 54.48,107.47 53.85,108.1 53.85,108.36 C10.2 | 54.36,106.45 51.56,106.45 50.42,107.59 CHANGE_BUTTON.2 50.29,107.72 46.86,107.72 CHANGE_BUTTON.1 | C6.2 70.99,107.09 71.76,106.33 71.76,105.44 71.63,105.31 68.83,105.31 66.55,107.59 BOOT_BUTTON.2 66.42,107.72 62.99,107.72 BOOT_BUTTON.1 62.87,107.59 57.91,102.64 v55.25,102.64 49.4,102.64 48.77,102.01 48.77,101.37 46.99,99.59 IC1.3 | v54.36,103.91 54.36,106.45 | J4.G1 16.38,85.5 16.38,86.51 17.14,87.27 17.14,90.32 16.38,91.08 J4.G2 16.26,91.21 16.26,92.23 14.1,94.39 14.1,98.83 | 14.1,98.83 10.16,98.83 9.27,99.72 C9.1 9.14,99.85 7.24,99.85 3.05,95.66 J4.G4 3.05,95.53 3.05,95.28 5.08,93.24 5.21,93.24 5.59,92.86 J4.P6 5.59,92.74 2.16,89.31 2.16,82.45 J4.G3 2.16,82.32 v2.16,67.84 | 14.1,98.83 15.11,99.85 D11.1 15.24,99.97 22.22,106.96 22.22,107.59 RESET_BUTTON.1 22.35,107.72 25.65,107.72 RESET_BUTTON.2 25.78,107.72 26.16,108.1 29.85,108.1 C5.2 29.97,108.23 30.35,108.61 v30.99,108.61 | U2.29_8 14.73,52.73 13.72,52.73 U2.29_5 13.59,52.73 | 12.45,51.46 12.45,52.6 U2.29_2 12.45,52.73 13.59,52.73 | U2.29_7 14.73,51.46 13.72,51.46 U2.29_4 13.59,51.46 12.45,51.46 | 12.45,51.46 U2.29_1 12.32,51.33 8,47.02 8,45.49 U2.1 8,45.37 8,44.98 12.45,40.54 18.16,40.54 36.96,21.74 40.54,21.74 D9.1 41.46,20.51 41.58,20.51 41.64,20.45 41.64,19.99 40.31,18.66 35.46,18.66 35.35,18.55 35.35,17.69 35.46,17.58 39.94,17.58 42.33,19.96 42.33,20.76 43.08,21.52 | U2.29_6 13.59,54 12.45,54 U2.29_3 12.32,54 8,58.32 v8,61.75 8,62.89 U2.28 | U2.29_9 14.73,54 13.72,54 U2.29_6 | 13.59,52.73 13.59,53.87 U2.29_6
  Top 0.127: 43.08,21.52 43.18,21.62 44.45,21.62 | 44.45,21.62 45.75,21.62 D8.1 | 43.08,21.52 D6.1 42.86,21.53 42.12,22.26 42.12,37.92 33.52,46.52 D10.1 33.52,47.3 34.18,47.96 34.18,49.09 32.51,50.76 32.51,51.21 32.64,51.33 32.64,51.72 31.75,52.6 31.75,56.03 | U1.9 34.67,57.94 v33.4,56.67 | 31.75,56.03 v32.39,56.67 | 31.75,56.03 U1.4 | C1.2 154.94,7.77 156.21,7.77 C2.2 156.21,10.06 | 157.1,10.44 157.1,10.69 SENSOR2.7 157.1,10.44 | 157.1,10.44 157.48,10.06 158.24,10.06 158.62,10.44 158.62,10.69 SENSOR2.5 | 156.21,10.06 156.72,10.06 157.1,10.44 | 156.21,10.06 155.96,10.06 155.83,10.19 155.83,11.33 156.21,11.71 156.21,13.62 SENSOR2.1 156.34,13.74 156.34,14 160.18,17.84 165.86,17.84 | J2.B12 162.81,50.83 162.81,50.57 J2.A1 162.94,50.45 162.94,49.17 163.32,48.79 J2.MP3 163.45,48.79 165.61,48.79 | 165.61,48.79 167.26,48.79 J2.MP1 167.34,52.52 165.7,54.16 165.7,54.44 167.34,56.08 J2.MP2 167.26,58.95 163.45,58.95 J2.MP4 163.32,58.95 162.94,58.57 162.94,57.3 J2.A12 162.81,57.18 162.81,57.05 J2.B1 162.81,56.92 162.18,56.92 155.7,50.45 | TP4.TP TP5.TP 147.32,58.7 154.94,51.08 C4_USB.2 154.94,50.95 155.19,50.95 155.7,50.45 | 149.86,44.48 149.86,43.46 150.37,42.95 150.37,41.43 R2-USB1.1 | 149.86,44.48 150.11,44.73 151,44.73 151.26,44.48 | 151.26,44.48 151.77,43.97 R2-USB.2 | 147.57,45.37 148.46,44.48 149.86,44.48 | 147.57,45.37 146.3,46.64 146.3,47.65 147.07,48.41 147.32,48.41 C5_USB.2 | 155.7,50.45 155.96,50.19 155.96,49.17 152.4,45.62 | 151.26,44.48 152.4,45.62 | D1.2 150.24,47.78 152.4,45.62 | 72.77,19.71 76.07,16.41 | 76.07,16.41 78.36,14.12 78.36,12.85 J1.MP2 | 72.77,19.71 72.77,21.74 D12.1
  Top 0.127: 72.77,19.71 70.36,17.3 C_DELAY.2 69.22,17.3 69.22,12.98 67.82,11.58 64.77,11.58 | 64.77,11.58 63.25,10.06 | 63.25,10.06 62.87,9.68 R2.2 | 64.14,14.76 62.61,13.23 62.23,13.23 61.47,12.47 SJ1.1 61.47,11.84 63.25,10.06 | 64.14,14.76 64.14,20.22 68.07,24.16 69.85,24.16 R4.1 | 64.14,14.76 EPD_C2.1 | 64.77,11.58 EPD_C1.1 | 82.93,14.63 82.93,13.87 83.69,13.11 85.6,13.11 87.25,14.76 87.25,15.14 J1.8 | 82.93,14.63 82.93,15.14 J1.17 | 76.84,21.11 75.69,21.11 75.44,20.85 75.44,19.96 76.2,19.2 EPD_C12.1 76.2,19.08 77.34,17.93 77.34,16.41 79.12,14.63 82.93,14.63 | 76.84,21.11 78.74,19.2 EPD_C11.1 78.74,19.08 v79.38,18.44 | 76.84,21.11 78.49,22.76 78.49,23.9 79.75,25.17 82.96,25.17 83.53,25.74 86.7,25.74 D3.1 | v82.17,19.2 81.28,19.2 EPD_C10.1 | v82.93,18.7 83.44,18.7 83.82,19.08 EPD_C9.1 83.82,19.2 86.36,19.2 | 89.66,20.85 89.66,19.96 88.9,19.2 EPD_C7.1 | 89.66,20.85 89.41,21.11 88.27,21.11 86.36,19.2 | 86.36,19.2 EPD_C8.1 | 91.82,18.7 91.82,12.85 J1.MP1 | 91.82,18.7 91.44,19.08 EPD_C6.1 | 91.82,18.7 92.2,19.08 93.98,19.08 EPD_C5.1 93.98,19.2 94.74,19.96 94.74,21.11 | 94.74,21.11 94.74,31.14 93.98,31.9 C7.2 | 89.66,20.85 90.68,20.85 90.93,21.11 94.74,21.11 | v76.58,16.92 76.07,16.41 | 95.5,51.97 95.5,56.41 93.22,58.7 92.33,58.7 91.44,59.59 91.44,63.91 90.55,64.8 87.63,64.8 87.25,64.42 87.25,61.62 87.88,60.99 88.77,60.99 89.53,61.75 C8.2 | U3.13 85.73,50.7 v85.98,50.95 | 95.5,51.97 v94.49,50.95 94.49,49.05 106.55,36.98 109.22,36.98 | 95.5,51.97 C10_SUPERCAP.1 | 130.81,52.73 130.3,52.22 129.92,52.22 U4.4 129.79,52.1 129.79,49.17 127.63,47.02 | U4.1 129.92,53.49 130.3,53.49 130.81,52.98 U4.9 130.81,52.73
  Top 0.127: 130.81,52.73 131.7,52.73 U4.6 | 124.46,50.83 122.68,50.83 120.9,49.05 MCP73831.2 | 127.63,47.02 127.51,46.89 126.49,46.89 124.46,48.92 124.46,50.83 | 124.46,50.83 R2_BAT.1 | 110.87,47.78 108.59,50.06 108.59,50.32 C2_BAT.1 | C1_BAT.1 110.87,47.78 | 116.2,37.62 123.06,37.62 123.19,37.75 | 116.2,37.62 IC4.2 | 123.19,37.75 125.22,35.71 128.27,35.71 C1_BAT2.1 | 123.19,37.75 C3.- 123.19,37.87 128.65,43.33 | 116.2,37.62 116.2,35.2 114.05,33.05 113.16,33.05 112.4,33.81 C1_BAT1.1 112.27,33.81 109.22,36.86 R1_PWRUSB.1 109.22,36.98 | 110.87,47.78 110.87,38.63 109.22,36.98 | 127.63,47.02 128.65,46 128.65,43.33 | 147.57,45.37 143.76,41.55 130.43,41.55 128.65,43.33 | 44.45,21.62 44.45,21.23 v44.96,20.73 | 165.86,17.84 J3.1 165.86,17.84 | 165.61,48.79 165.61,22.11 166.4,21.32 166.4,18.35 166.14,18.09 166.12,18.09 165.86,17.84
  Bottom 0.127: v55.25,102.64 54.36,103.53 v54.36,103.91 45.08,103.91 40.13,108.86 31.24,108.86 v30.99,108.61 | v32.39,56.67 v33.4,56.67 | 82.37,19.2 82.42,19.2 v82.93,18.7 | 82.37,19.2 v82.17,19.2 81.41,18.44 v79.38,18.44 77.85,16.92 v76.58,16.92 73.15,16.92 68.45,21.62 63.88,21.62 62.99,20.73 v44.96,20.73 | v94.49,50.95 v85.98,50.95 82.37,47.35 82.37,19.2 | v2.16,67.84 8,62 v8,61.75
  pour Bottom: 76.15,10.08 76.17,10.09 94.41,10.09 94.43,10.08 94.45,10.06 94.47,10.03 94.47,0.04 170.16,0.04 170.16,67.14 92.22,67.14 92.2,67.15 92.18,67.17 92.16,67.2 92.16,111.19 73.77,111.19 73.77,109.9 73.75,109.87 73.73,109.85 73.71,109.84 15.22,109.84 15.2,109.85 15.18,109.87 15.16,109.9 15.16,111.19 0.07,111.19 0.07,0.04 76.11,0.04 76.11,10.03 76.13,10.06
  pour Top: 76.15,10.08 76.17,10.09 94.41,10.09 94.43,10.08 94.45,10.06 94.47,10.03 94.47,0.04 170.16,0.04 170.16,67.14 92.22,67.14 92.2,67.15 92.18,67.17 92.16,67.2 92.16,111.24 73.72,111.24 73.72,109.95 73.7,109.92 73.68,109.9 73.66,109.89 15.22,109.89 15.2,109.9 15.18,109.92 15.16,109.95 15.16,111.24 0.07,111.09 0.07,0.09 76.11,0.04 76.11,10.03 76.13,10.06
GPIO8
  Top 0.127: R1.2 19.05,43.71 19.43,44.09 19.43,45.37 U2.10
I2C_PW  (via drill 0.3)
  Top 0.127: R1_PINH.2 158.75,7.77 157.48,7.77 R2-PINH.2 157.48,7.9 v156.72,8.66 | v108.71,45.37 91.69,62.38 91.69,64.03 89.92,65.81 73.15,65.81 62.99,55.65 62.74,55.65 59.56,58.83 v41.91,58.83 | v29.08,60.1 24.38,60.1 21.97,62.51 21.97,62.89 U2.17
  Bottom 0.127: v156.72,8.66 120.02,45.37 v108.71,45.37 | v41.91,58.83 40.13,60.61 29.59,60.61 v29.08,60.1
INT_RTC  (via drill 0.3)
  Top 0.127: 87.5,56.8 87.5,58.19 87,58.7 U3.3 87,58.83 86.49,59.34 v86.49,60.22 | 87.5,56.8 87.5,48.67 88.14,48.03 88.14,47.52 R1_PINH1.1 | v21.46,50.45 16.89,45.87 16.89,45.49 U2.8 | v34.67,51.21 38.73,51.21 41.91,54.38 84.33,54.38 86.74,56.8 87.5,56.8 | v88.9,70.77 88.9,74.96 91.44,77.5 91.44,81.31 90.17,82.58 90.17,87.15 TP15.TP
  Bottom 0.127: v21.46,50.45 31.75,50.45 32.89,51.59 33.78,51.59 34.16,51.21 v34.67,51.21 | v88.9,70.77 88.9,69.62 86.49,67.21 v86.49,60.22
IO/BOOT
  Top 0.127: C6.1 70.87,105.94 69.72,105.94 66.55,109.12 BOOT_BUTTON.3 66.42,109.25 62.99,109.25 BOOT_BUTTON.4 62.87,109.12 60.58,106.83 58.55,106.83 R_BOOT.2 58.42,106.83 54.99,103.4 54.23,103.4 53.21,104.42 44.32,104.42 43.94,104.04 43.94,103.91 24.51,84.48 24.51,63.02 U2.15
IO/CHANGE
  Top 0.127: C10.1 53.72,107.09 52.45,107.09 50.42,109.12 CHANGE_BUTTON.3 50.29,109.12 46.86,109.12 CHANGE_BUTTON.4 46.74,109.12 45.59,107.98 41.02,107.98 R_CHANGE.2 40.89,107.85 40.26,107.21 40.26,106.83 14.35,80.92 14.35,63.02 U2.23
MISO  (via drill 0.3)
  Top 0.127: v10.03,99.59 11.05,99.59 R8.1 | v7.49,97.05 7.49,95.15 6.22,93.88 | 6.22,93.88 5.97,93.88 J4.P7 6.22,93.88 | 30.73,58.57 28.83,58.57 v22.48,52.22 | 30.73,58.57 U1.2 | v16,58.7 13.08,58.7 9.27,62.51 9.27,62.89 U2.27 | v69.22,21.49 69.47,21.74 71.12,21.74 D12.2 | 30.73,58.57 v30.73,57.94 | TP6.TP 6.35,30.51 v15.62,39.78 | 6.22,93.88 6.22,93.62 6.86,92.99 6.86,91.21 6.73,91.08 4.83,91.08 4.7,90.96 4.7,71.91 11.43,65.18 11.43,64.16 v11.3,64.03
  Bottom 0.127: v7.49,97.05 v10.03,99.59 | v69.22,21.49 33.27,57.43 31.24,57.43 v30.73,57.94 | v15.62,39.78 15.62,45.37 v22.48,52.22 v16,58.7 11.3,63.4 v11.3,64.03
MOSI  (via drill 0.3)
  Top 0.127: v12.83,99.34 13.34,99.85 13.72,99.85 D11.2 | v12.83,98.32 12.83,96.29 5.97,89.43 J4.P3 | 52.07,92.23 52.07,69.62 v40.77,58.32 | 52.07,92.23 52.07,100.1 R7.1 | v40.39,56.29 39.75,56.29 39.5,56.03 U1.5 38.86,56.03 35.05,52.22 34.16,52.22 v33.02,51.08 | 52.07,92.23 v40,92.23 | v83.44,14.38 83.82,14.38 84.33,14.89 84.33,15.14 J1.14 | v82.17,13.11 80.65,13.11 78.23,10.69 68.07,10.69 65.53,8.15 26.04,8.15 19.05,15.14 19.05,19.08 18.29,19.84 17.65,19.84 | 17.65,19.84 12.7,19.84 TP7.TP | v16.13,41.3 15.62,41.81 15.62,45.37 U2.7 | v16.26,39.78 17.65,38.38 17.65,19.84
  Bottom 0.127: v12.83,99.34 v12.83,98.32 33.91,98.32 v40,92.23 | v40.77,58.32 40.77,56.67 v40.39,56.29 | v82.17,13.11 v83.44,14.38 | v16.26,39.78 16.13,39.9 v16.13,41.3 16.13,42.06 18.8,44.73 26.67,44.73 v33.02,51.08
N$1
  Top 0.127: R2-USB1.2 151.89,41.43 151.89,42.19 162.31,52.6 162.81,52.6 J2.A5
N$2
  Top 0.127: R2-USB.1 150.5,43.97 151.26,43.21 152.15,43.21 162.05,53.11 162.05,55.4 162.18,55.53 162.81,55.53 J2.B5
N$10
  Top 0.127: C5_USB.1 147.32,47.14 147.57,47.14 148.97,48.54 148.97,49.05 149.48,49.56 154.94,49.56 C4_USB.1
N$13
  Top 0.127: 90.55,26.19 90.55,25.68 88.39,23.52 88.14,23.52 86.74,24.92 83.08,24.92 83.07,24.91 80.64,24.91 80.06,24.33 C4.1 | 90.55,26.19 87.25,29.49 87.25,30 D4.1 | 90.55,26.19 D3.2
N$14
  Top 0.127: R1_BAT.2 118.11,45.49 120.65,48.03 MCP73831.1
N$15
  Top 0.127: 114.68,36.6 115.32,36.6 IC4.3 | 113.67,36.6 114.68,36.6 | 113.67,36.6 111.76,36.6 D2.1 | 113.67,36.6 113.67,33.81 C1_BAT1.2 | 114.68,36.6 114.68,38 114.81,38.13 114.94,38.13 115.32,38.51 IC4.1 115.44,38.63 115.95,39.14 123.19,39.14 127.89,43.84 127.89,45.49 Q1.2
N$16
  Top 0.127: CHG_LED.C 114.94,50.32 114.94,49.43 114.3,48.79 114.3,46.89 117.86,43.33 118.11,43.33 R1_BAT.1
N$17
  Top 0.127: J1.24 79.25,15.27 79.25,17.43 76.2,20.47 EPD_C12.2
N$18  (via drill 0.3)
  Top 0.127: v120.65,50.7 122.17,52.22 124.46,52.22 R2_BAT.2 | v119.63,49.68 118.11,48.16 MCP73831.5
  Bottom 0.127: v119.63,49.68 v120.65,50.7
N$19
  Top 0.127: C1.1 154.94,6.5 156.21,6.5 C2.1
N$20  (via drill 0.3)
  Top 0.127: v62.87,56.16 62.87,90.58 52.58,100.86 51.05,100.86 50.55,101.37 49.78,101.37 IC1.5 | v62.87,53.37 62.87,34.19 71.63,25.43 71.63,25.17 71.88,24.92 72.9,24.92 73.15,24.66 73.15,23.52 72.01,22.38 72.01,21.36 67.95,17.3 C_DELAY.1
  Bottom 0.127: v62.87,53.37 v62.87,56.16
N$21
  Top 0.127: R_CAPACITOR.1 92.71,58.06 92.33,58.45 92.2,58.45 90.55,60.1 90.55,64.42 90.42,64.54 88.52,64.54 87.88,63.91 D7.1
N$22
  Top 0.127: J1.22 80.39,15.27 80.39,19.58 81.28,20.47 EPD_C10.2
N$26  (via drill 0.3)
  Top 0.127: v83.95,18.44 81.41,15.9 81.41,15.27 J1.20 | v85.22,19.71 85.6,19.71 86.36,20.47 EPD_C8.2
  Bottom 0.127: v85.22,19.71 v83.95,18.44
N$28
  Top 0.127: J1.19 81.92,15.27 81.92,16.03 83.82,17.93 86.36,17.93 88.9,20.47 EPD_C7.2
N$30
  Top 0.127: J1.18 82.42,15.27 82.42,16.16 83.95,17.68 88.52,17.68 90.42,19.58 90.42,19.71 91.19,20.47 91.44,20.47 EPD_C6.2
N$32  (via drill 0.3)
  Top 0.127: v85.34,16.03 84.2,16.03 83.95,15.77 83.95,15.27 J1.15 | v86.23,16.92 88.14,16.92 90.68,19.46 90.68,19.58 90.93,19.84 93.34,19.84 93.98,20.47 EPD_C5.2
  Bottom 0.127: v86.23,16.92 v85.34,16.03
N$34  (via drill 0.3)
  Top 0.127: v79.38,14.12 82.17,14.12 83.44,12.85 86.87,12.85 88.77,14.76 88.77,15.14 J1.5 | v77.85,14 70.61,14 65.53,8.92 62.48,8.92 60.58,10.82 60.58,13.11 62.23,14.76 EPD_C2.2
  Bottom 0.127: v79.38,14.12 79.25,14 v77.85,14
N$36  (via drill 0.3)
  Top 0.127: v87.25,16.03 88.9,16.03 89.28,15.65 89.28,15.27 J1.4 | v68.58,12.98 64.77,12.98 EPD_C1.2
  Bottom 0.127: v87.25,16.03 83.06,11.84 69.72,11.84 v68.58,12.98
PREVGH
  Top 0.127: J1.21 80.9,15.27 80.9,17.3 83.06,19.46 83.06,19.71 83.82,20.47 EPD_C9.2 83.82,20.6 84.33,21.11 87.25,21.11 91.69,25.55 91.69,30.25 87.25,34.7 78.74,34.7 78.36,34.32 78.36,29.36 78.49,29.24 84.07,29.24 84.2,29.36 84.2,31.52 83.95,31.78 83.69,31.78 81.66,33.81 D5.1
PREVGL  (via drill 0.3)
  Top 0.127: 79.38,19.84 78.74,20.47 EPD_C11.2 | 79.38,19.84 79.88,19.33 79.88,15.27 J1.23 | v90.55,28.73 90.55,30 D4.2 | 79.38,19.84 83.79,24.25 v86.23,24.25
  Bottom 0.127: v90.55,28.73 86.23,24.41 v86.23,24.25
RESE
  Top 0.127: J1.3 89.79,15.14 89.79,14.76 87.63,12.6 83.31,12.6 82.3,13.62 79.25,13.62 77.09,15.77 77.09,17.17 75.18,19.08 75.18,22.89 Q3.2 75.18,23.01 72.64,25.55 72.39,25.55 R3.2
RESE'
  Top 0.127: SJ1.2 65.79,15.01 65.79,18.82 66.55,19.58 66.67,19.58 71.25,24.16 72.39,24.16 R3.1
RESET  (via drill 0.3)
  Top 0.127: R_RESET.2 18.41,107.21 20.32,107.21 22.22,109.12 RESET_BUTTON.4 22.35,109.25 25.65,109.25 RESET_BUTTON.3 25.78,109.12 31.11,109.12 31.5,108.74 31.5,108.48 31.37,108.36 | 31.37,108.36 29.97,106.96 C5.1 29.85,106.83 29.85,96.8 13.84,80.8 v13.84,64.03 | v44.45,103.91 IC1.1 | 31.37,108.36 v40,108.36 | v16.13,61.75 16.51,61.37 16.51,51.97 10.54,46 10.54,45.49 U2.3
  Bottom 0.127: v40,108.36 v44.45,103.91 | v13.84,64.03 v16.13,61.75
RTC_RST
  Top 0.127: U3.4 85.73,58.45 82.17,54.89 62.36,54.89 60.45,56.8 39.24,56.8 34.92,52.48 33.4,52.48 32.89,52.98 32.89,59.59 31.88,60.61 25.15,60.61 23.24,62.51 23.24,62.89 U2.16
RX  (via drill 0.3)
  Top 0.127: v29.34,98.83 29.34,96.67 13.08,80.42 13.08,63.02 U2.24 | v50.8,102.13 53.47,102.13 53.98,101.63 81.79,101.63 TP2.TP
  Bottom 0.127: v29.34,98.83 47.5,98.83 v50.8,102.13
SCK  (via drill 0.3)
  Top 0.127: v84.45,13.87 84.84,14.25 84.84,15.14 J1.13 | v82.93,12.35 80.26,12.35 78.36,10.44 68.2,10.44 65.66,7.9 25.91,7.9 17.78,16.03 | TP8.TP 17.78,16.03 | R6.1 31.75,47.14 33.14,48.53 D10.2 33.03,48.53 32.13,49.43 v32.13,51.59 | U1.6 39.12,57.3 34.8,52.98 v33.53,52.98 | v26.29,57.3 25.78,57.3 14.35,45.87 14.35,45.49 U2.6 | v10.92,65.05 9.52,66.45 | 9.52,66.45 4.45,71.53 4.45,91.08 4.95,91.59 5.84,91.59 J4.P5 | 17.78,16.03 11.94,16.03 6.86,10.95 5.84,10.95 5.08,11.71 5.08,43.33 6.98,45.24 6.98,63.91 9.52,66.45
  Bottom 0.127: v82.93,12.35 v84.45,13.87 | v33.53,52.98 v32.13,51.59 32,51.59 v26.29,57.3 18.41,57.3 16.51,59.21 16.51,59.46 v10.92,65.05
SCL  (via drill 0.3)
  Top 0.127: v141.22,42.06 141.22,43.97 132.21,52.98 131.83,52.98 U4.7 | 162.31,20.98 v142.49,40.79 | 157.48,6.38 157.73,6.38 158.24,5.87 159.26,5.87 159.77,6.38 159.77,12.6 158.75,13.62 SENSOR2.4 158.62,13.74 v162.31,17.43 | U3.16 89.53,48.67 88.9,48.03 88.9,47.02 130.05,5.87 156.97,5.87 157.48,6.38 | 157.48,6.38 R2-PINH.1 | v162.31,19.46 162.31,20.98 | 162.31,20.98 165.13,20.98 J3.4
  Bottom 0.127: v142.49,40.79 v141.22,42.06 | v162.31,17.43 v162.31,19.46
SDA  (via drill 0.3)
  Top 0.127: 158.75,6.5 159.51,7.27 159.51,11.84 157.99,13.36 157.99,13.62 SENSOR2.3 | v143.64,42.06 132.21,53.49 131.83,53.49 U4.8 131.7,53.62 131.44,53.62 126.75,58.32 v96.77,58.32 | v143.64,40.79 143.64,40.03 162.18,21.49 165.87,21.49 166.14,21.22 166.14,20.46 166.03,20.35 165.93,20.35 | 165.86,19.84 165.93,20.35 | 158.75,6.5 158.12,7.14 154.43,7.14 154.18,7.39 154.18,12.6 159.93,18.35 166.03,18.35 166.14,18.46 166.14,19.22 166.03,19.33 165.48,19.33 165.03,19.78 | 158.75,6.5 R1_PINH.1 | 165.03,19.78 165.86,19.84 | v24,64.03 20.19,64.03 19.43,63.27 19.43,63.02 U2.19 | v37.72,58.83 38.23,58.83 39.24,57.81 59.82,57.81 62.48,55.14 75.44,55.14 81.03,60.73 86.61,60.73 87.76,59.59 87.76,53.75 | 87.76,53.75 87.76,50.06 88.27,49.56 U3.15 | 87.76,53.75 v92.2,53.75 | J3.3 165.86,19.84 | 165.93,20.35 165.6,20.35 165.03,19.78
  Bottom 0.127: v143.64,40.79 v143.64,42.06 | v24,64.03 24.51,64.03 29.72,58.83 v37.72,58.83 | v92.2,53.75 v96.77,58.32
SRC  (via drill 0.3)
  Top 0.127: v77.98,23.01 77.34,23.65 Q3.3 | L1.1 81.03,31.01 78.74,33.3 78.74,34.32 78.87,34.44 82.3,34.44 82.93,33.81 D5.2 84.71,33.81 91.44,27.08 91.44,25.68 89.03,23.27 88.01,23.27 86.61,24.67 83.82,24.67 82.8,23.65 C4.2 81.13,23.65 80.24,22.76 v78.99,22.76
  Bottom 0.127: v77.98,23.01 78.74,23.01 v78.99,22.76
SS_SD  (via drill 0.3)
  Top 0.127: v45.85,19.71 45.85,19.96 46.67,20.78 46.67,22.3 46.4,22.56 46.32,22.56 D8.2 45.75,38.6 34.16,50.19 34.16,51.59 v34.29,51.72 | v17.02,59.34 17.02,52.1 11.81,46.89 11.81,45.49 U2.4 | v12.57,64.03 12.57,64.54 12.7,64.67 12.7,81.94 6.35,88.29 J4.P2 | R10.1 44.55,16.35 45.19,16.99 45.19,18.55 v45.34,18.7
  Bottom 0.127: v45.34,18.7 45.34,19.2 v45.85,19.71 | v12.57,64.03 17.02,59.59 v17.02,59.34 27.81,59.34 34.29,52.86 v34.29,51.72
TX  (via drill 0.3)
  Top 0.127: v12.19,64.8 11.81,64.42 11.81,63.02 U2.25 | v54.1,102.13 75.95,102.13 TP1.TP
  Bottom 0.127: v12.19,64.8 16.76,64.8 v54.1,102.13
USB_D+  (via drill 0.3)
  Top 0.127: v90.68,66.07 131.19,66.07 146.94,50.32 155.45,50.32 155.7,50.06 155.7,49.3 155.45,49.05 154.43,49.05 154.18,49.3 151.77,49.3 151.26,48.79 149.99,48.79 D1.1 | v89.79,65.3 73.03,65.3 63.12,55.4 62.61,55.4 59.69,58.32 v41.4,58.32 | v31.37,57.94 24.51,51.08 24.51,45.49 U2.14
  Bottom 0.127: v90.68,66.07 89.92,65.3 v89.79,65.3 | v41.4,58.32 40.89,58.83 38.35,58.83 37.47,57.94 v31.37,57.94
USB_D-  (via drill 0.3)
  Top 0.127: v94.49,60.61 136.27,60.61 148.08,48.79 148.08,48.03 147.83,47.78 146.81,47.78 146.56,47.52 146.56,46.76 146.81,46.51 147.83,46.51 148.08,46.76 149.86,46.76 D1.3 | v85.98,55.4 85.73,55.4 84.2,53.87 41.78,53.87 v36.45,48.54 | v32.51,44.6 25.15,44.6 25.02,44.48 23.75,44.48 23.24,44.98 23.24,45.37 U2.13
  Bottom 0.127: v94.49,60.61 89.28,55.4 v85.98,55.4 | v32.51,44.6 v36.45,48.54
VBAT
  Top 0.127: U4.2 129.92,52.98 129.92,52.73 U4.3 129.79,52.6 129.54,52.6 127,50.06 | 127,50.06 Q1.3 | 110.11,50.32 112.4,50.32 113.28,51.21 119.51,51.21 120.65,50.06 MCP73831.3 120.78,50.06 122.3,51.59 124.97,51.59 126.49,50.06 127,50.06 | 110.11,50.32 C2_BAT.2 109.98,50.32 | 110.11,50.32 104.52,55.91 98.55,55.91 93.98,60.48 93.98,62.13 90.17,65.94 90.17,66.19 91.69,67.72 91.69,94.13 90.17,95.66 90.17,103.66 TP3.TP
VBUS  (via drill 0.3)
  Top 0.127: 118.87,43.71 118.87,42.95 118.62,42.7 118.49,42.7 114.55,38.76 111.76,38.76 D2.2 | 118.87,43.71 118.62,43.97 117.6,43.97 115.06,46.51 115.06,47.78 | 118.87,43.71 120.65,45.49 125.98,45.49 Q1.1 126.11,45.49 127.38,44.22 v127.38,43.97 | PFMF.050.1.2 150.5,38.89 148.08,41.3 130.05,41.3 v128.65,42.7 | 115.7,50.95 117.09,50.95 117.98,50.06 MCP73831.4 | 115.7,50.95 114.55,50.95 113.92,50.32 CHG_LED.A 113.54,50.32 112.78,49.56 109.47,49.56 109.22,49.81 109.22,50.83 108.97,51.08 108.2,51.08 107.95,50.83 | R1_PWRUSB.2 109.22,48.54 107.95,49.81 107.95,50.83 | v89.53,68.22 88.14,69.62 88.14,90.2 90.04,92.1 90.04,93.5 TP14.TP | v102.36,55.4 103.38,55.4 107.95,50.83 | 115.06,47.78 115.06,49.17 115.7,49.81 115.7,50.95 | 115.06,47.78 C1_BAT.2
  Bottom 0.127: v127.38,43.97 v128.65,42.7 | v102.36,55.4 v89.53,68.22
VRTC  (via drill 0.3)
  Top 0.127: v89.53,62.64 89.15,62.64 88.27,61.75 C8.1 | v91.95,60.22 92.71,59.46 R_CAPACITOR.2 92.84,59.46 96.52,55.78 96.52,51.21 95.63,50.32 95.63,49.81 C10_SUPERCAP.2 | v87,56.29 U3.14
  Bottom 0.127: v91.95,60.22 91.44,60.73 | 91.44,60.73 v89.53,62.64 | 91.44,60.73 v87,56.29
VUSB
  Top 0.127: J2.A4 162.81,51.21 162.18,51.21 153.16,42.19 153.16,37.11 152.91,36.86 149.73,36.86 147.7,38.89 PFMF.050.1.1